# Altium PCB CarGeoLogger.PcbDoc
Units mil, origin at the board's own origin, x right, y up, seen from the top; angles counter-clockwise.
Board outline 2000 x 2000 mil, 2 copper layers (Top Layer, Bottom Layer); 46 components, 44 nets, 249 pads, 53 vias.
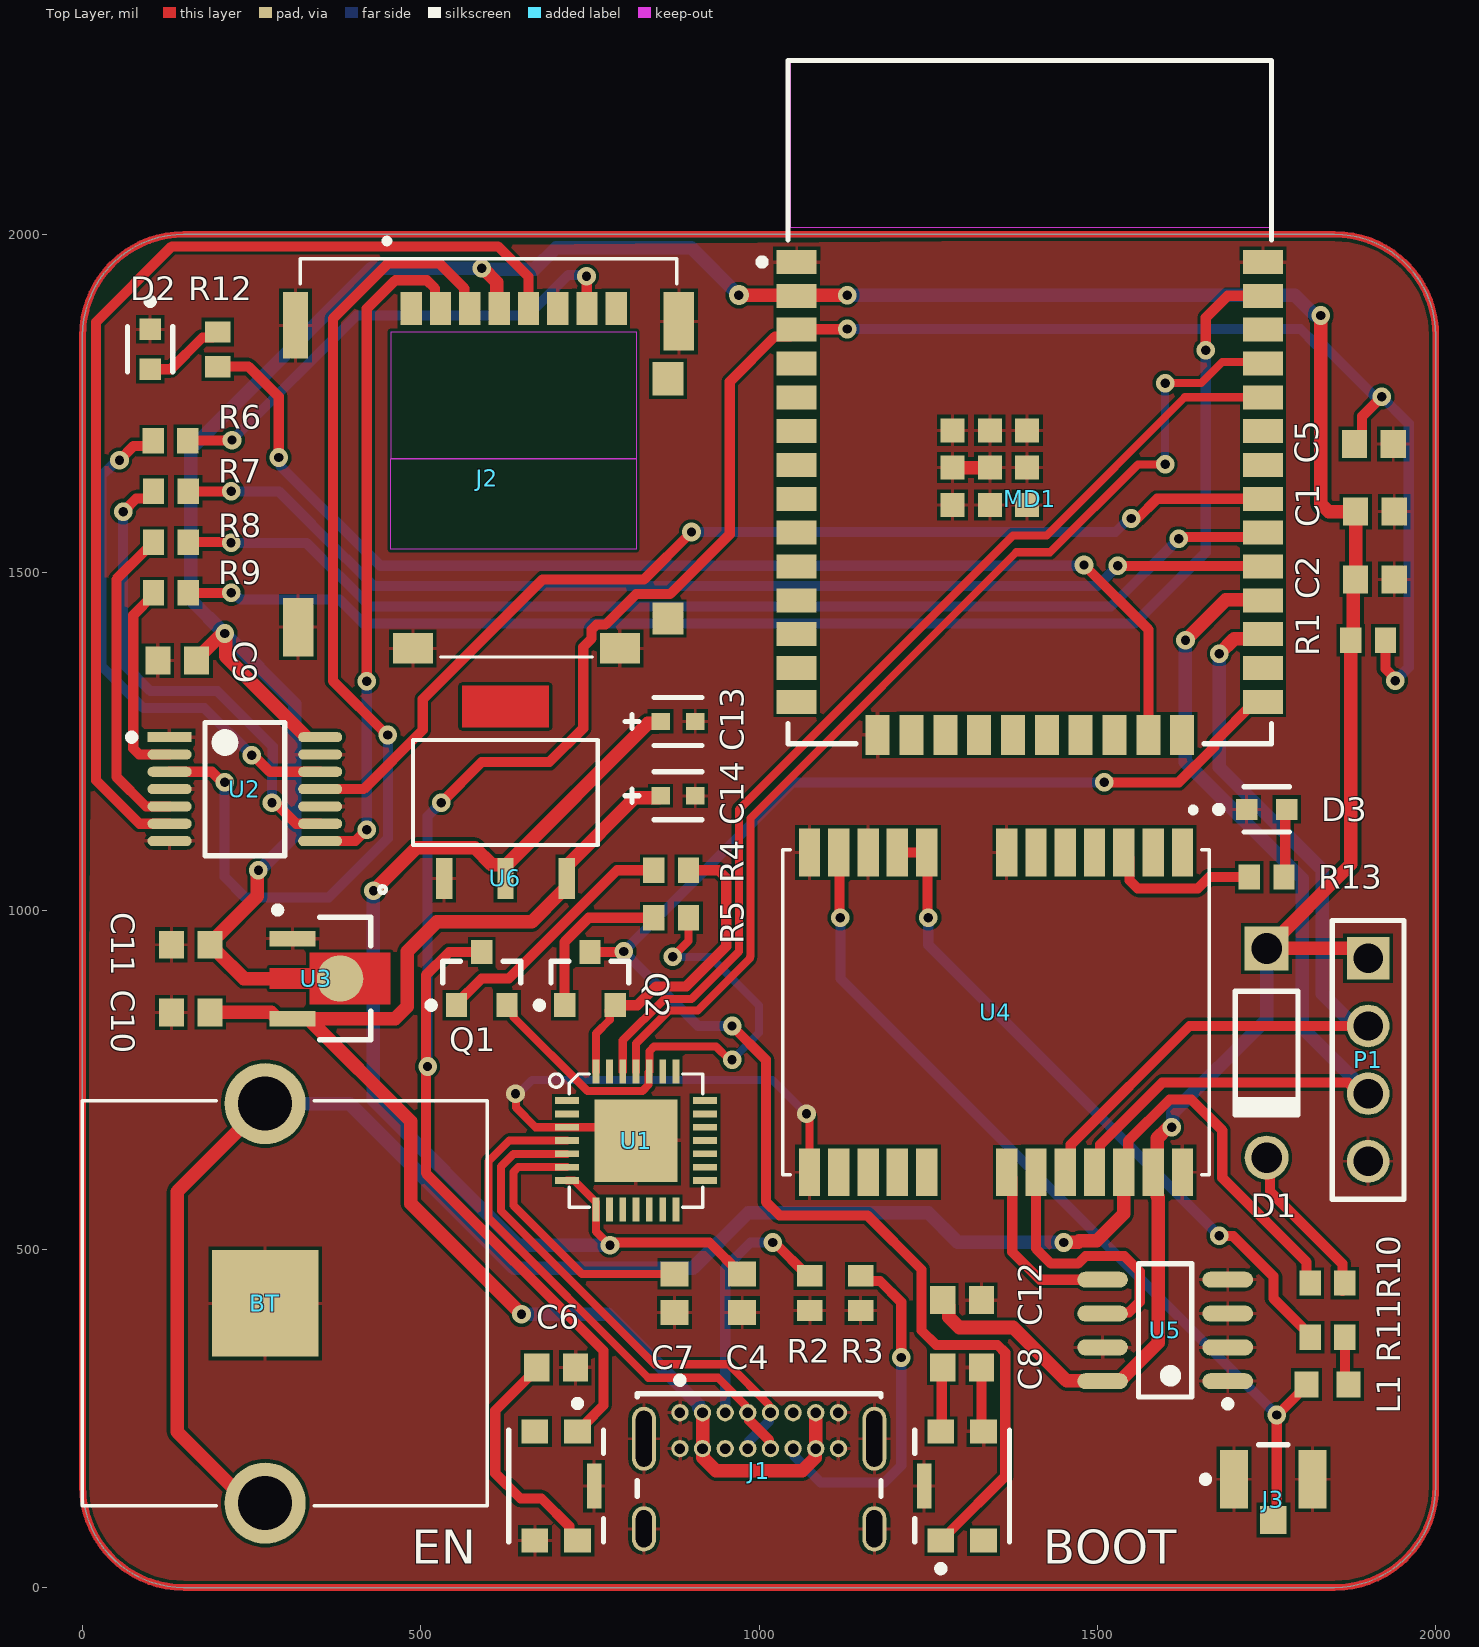
[diagram p0: Top Layer view]
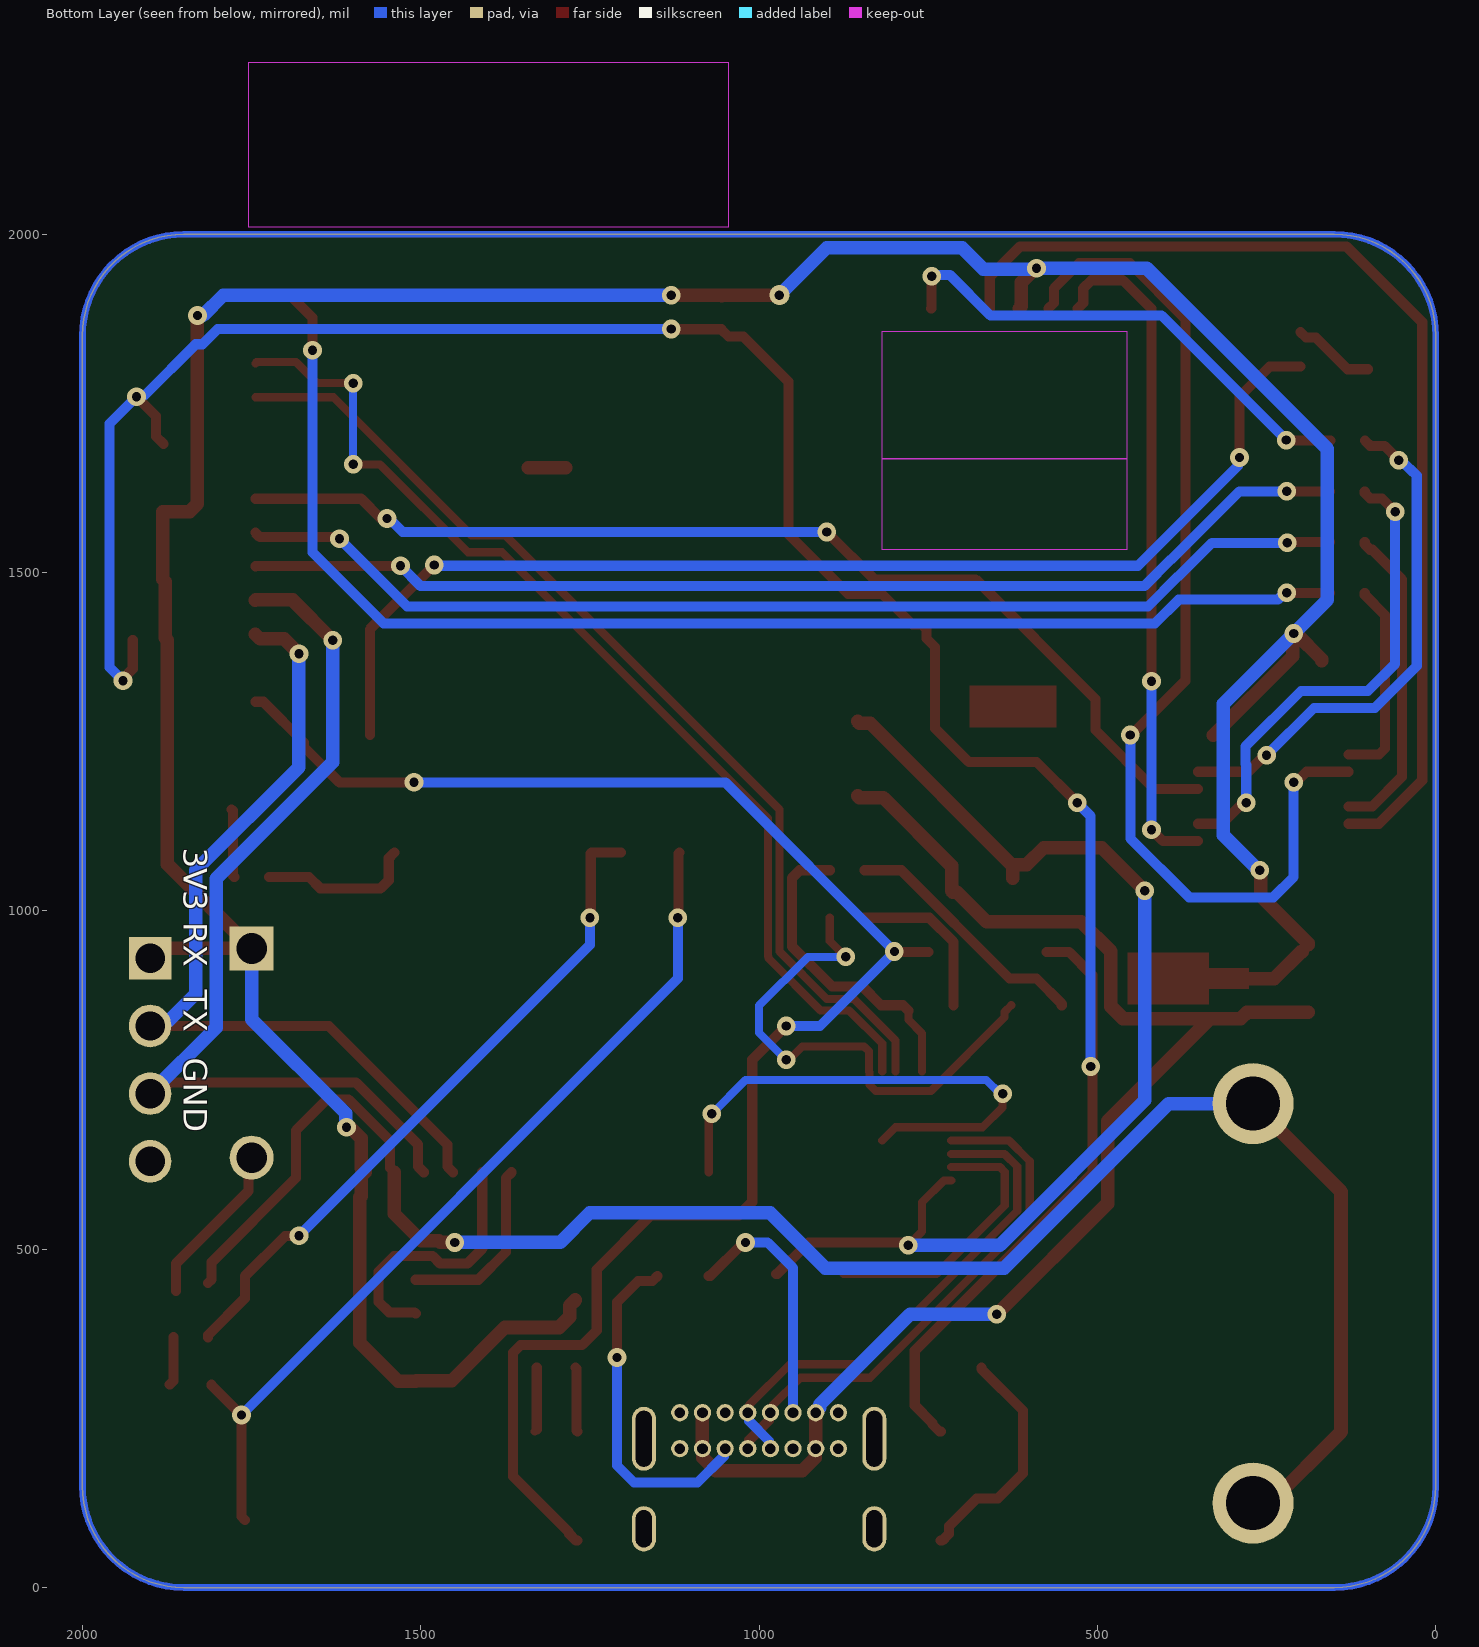
[diagram p1: Bottom Layer view, seen from below]
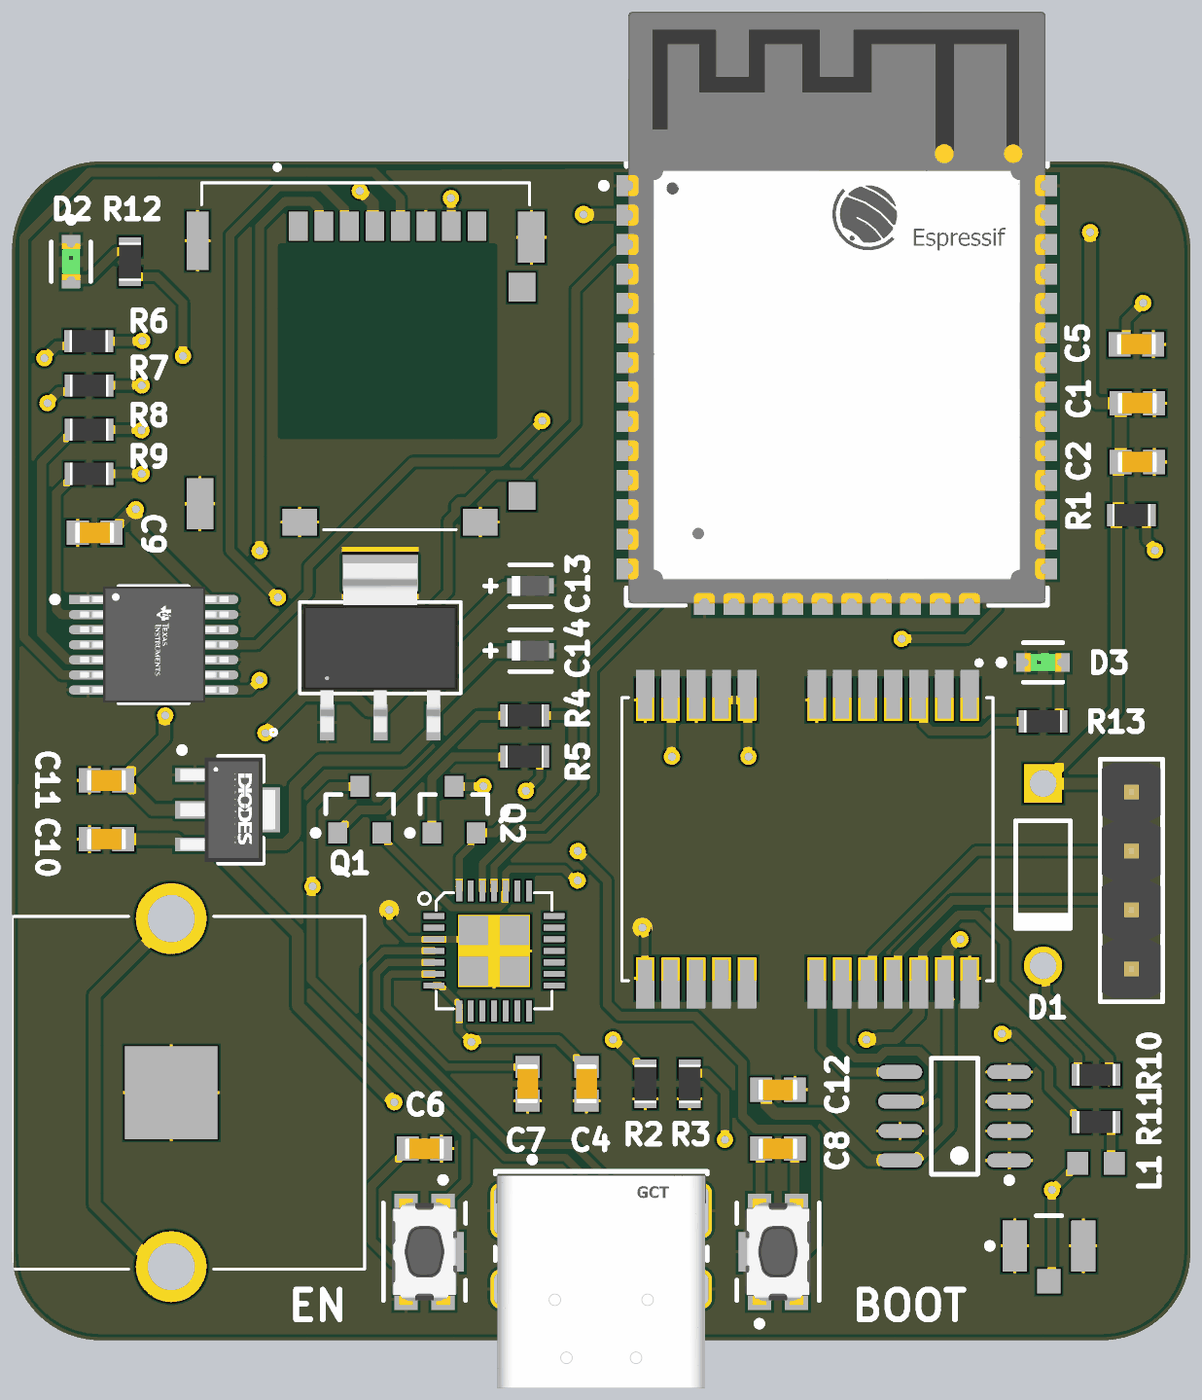
[diagram p2: 3D render of the assembled board from above, using the file's embedded part models]

## Layer stack, top to bottom
Top Solder: solder mask 0.4, Solder Resist, Dk 3.5
Top Layer: signal copper 1.4
Dielectric 1: dielectric 12.6, FR-4, Dk 4.8
Bottom Layer: signal copper 1.4
Bottom Solder: solder mask 0.4, Solder Resist, Dk 3.5

## Board outline
0,150 0,1850 cw(c150,1850) 150,2000 1850,2000 cw(c1850,1850) 2000,1850 2000,150 cw(c1850,150) 1850,0 150,0 cw(c150,150)

## Design rules (kind name [scope] priority, off if disabled: settings)
BoardOutlineClearance [All] p1: gap=7.87 ignorepadtopadclearanceinfootprint=FALSE
Clearance [All] p1: gap=5 ignorepadtopadclearanceinfootprint=FALSE except(9.84: Arc-Hole Track-Hole SMDPad-Hole THPad-Hole Via-Hole Fill-Hole Poly-Hole Region-Hole Text-Hole)
ComponentClearance [All] p1: gap=5 collisioncheckmode=3 verticalgap=5 showdistances=TRUE
DiffPairsRouting [All] p1: maxlimit=10 minlimit=5 mostfreqgap=5 toplayer_minwidth=5 toplayer_maxwidth=1000 toplayer_prefwidth=5 bottomlayer_minwidth=5 bottomlayer_maxwidth=1000 bottomlayer_prefwidth=5 maxuncoupledlength=500
Height [All] p1: minheight=0 maxheight=71497.94 prefheight=500
HoleSize [All] p1: absolutevalues=TRUE maxlimit=248.03 minlimit=11.81 maxpercent=80.000 minpercent=20.000
HoleToHoleClearance [All] p1: gap=9.84 allowstackedmicrovias=FALSE
MinimumAnnularRing [All] p1: minimumring=3
MinimumSolderMaskSliver [All] p1: minsoldermaskwidth=0
PlaneClearance [All] p1: clearance=5
PlaneConnect PlaneConnectPowerPads [InPadClass('PowerPads')] p1: planeconnectstyle=Direct reliefexpansion=20 reliefentries=4 reliefconductorwidth=10 reliefairgap=10
PlaneConnect [All] p2: pad.planeconnectstyle=Relief pad.reliefexpansion=11.81 pad.reliefentries=4 pad.reliefconductorwidth=5 pad.reliefairgap=5 via.planeconnectstyle=Direct via.reliefexpansion=11.81 via.reliefentries=4 via.reliefconductorwidth=5 via.reliefairgap=5
PolygonConnect PolygonConnectPowerPads [All vs (InPadClass('PowerPads'))] p1: connectstyle=Direct reliefconductorwidth=10 reliefentries=4 polygonreliefangle="90 Angle" airgapwidth=10
PolygonConnect [All] p2: thpad.connectstyle=Relief thpad.reliefconductorwidth=5 thpad.reliefentries=4 thpad.polygonreliefangle="90 Angle" thpad.airgapwidth=5 smdpad.connectstyle=Relief smdpad.reliefconductorwidth=5 smdpad.reliefentries=4 smdpad.polygonreliefangle="90 Angle" smdpad.airgapwidth=5 via.connectstyle=Direct via.reliefconductorwidth=5 via.reliefentries=4 via.polygonreliefangle="90 Angle" via.airgapwidth=5
RoutingVias [All] p1: holewidth=11.81 width=23.62 viastyle="Through Hole" minholewidth=11.81 minwidth=23.62 maxholewidth=23.62 maxwidth=259.84
SilkToSilkClearance [All] p1: silktosilkclearance=0
SilkToSolderMaskClearance [IsPad] p1: minsilkscreentomaskgap=5 clearancetoexposedcopper=TRUE
SolderMaskExpansion [All] p1: expansion=2.95 istentingtop=FALSE
Width [All] p1: maxlimit=1000 minlimit=5 preferedwidth=5 minimp=50.000000 maximp=50.000000 favimp=50.000000
20 further rules are at their usual default settings.

## Components (designator, comment, footprint, x,y, rotation, side; value= is the part's Value field where it differs from the comment)
BOOT "KMR221GLFS" FP-KMR221GLFS-MFG 1300,150 r90 top (schematic designator SW2)
BT "BHX1-LR44-PC" BAT_BHX1-LR44-PC 270,420 r90 top
C1 "10u" CAPC1608X90X35ML10T15 1910,1590 r180 top
C2 "0.1u" CAPC1608X90X35ML10T15 1910,1490 r180 top
C4 "1u" CAPC1608X90X35ML10T15 975,435 r90 top
C5 "0.1u" CAPC1608X90X35ML10T15 1908.54,1690 r180 top
C6 "0.1u" CAPC1608X90X35ML10T15 700,325 r180 top
C7 "0.1u" CAPC1608X90X35ML10T15 875,435 r90 top
C8 "0.1u" CAPC1608X90X35ML10T15 1300,325 r180 top
C9 "0.1u" CAPC1608X90X35ML10T15 140,1370 r0 top
C10 "10u" CAPC1608X90X35ML10T15 160,850 r0 top
C11 "22u" CAPC1608X90X35ML10T15 160,950 r0 top
C12 "0.1u" CAPC1608X90X35ML10T15 1300,425 r180 top
C13 "10u" FP-F38M-MFG 880,1280 r180 top value=10uF
C14 "10u" FP-F38M-MFG 880,1170 r180 top value=10uF
D1 "1N5817-T" DIOD-DO-41-P-2 1750,790 r270 top
D2 "LTST-C190GKT" FP-LTST-C190GKT-MFG 100,1830 r270 top
D3 "LTST-C190GKT" FP-LTST-C190GKT-MFG 1750,1150 r0 top
EN "KMR221GLFS" FP-KMR221GLFS-MFG 700,150 r270 top (schematic designator SW1)
J1 "USB4085-GF-A" FP-USB4085-GF-A-MFG 1000,100 r0 top
J2 "503182-1852" MOLEX_503182-1852 600,1640 r0 top
J3 "U.FL-R-SMT(10)" HRS-U.FL-R-SMT_V 1760,160 r0 top
L1 "27u" INDC1608X95N 1840,300 r180 top
MD1 "ESP32-WROOM-32D(M113DH2800PH3Q0)" FP-ESP32-WROOM-32D_M113DH-MFG 1400,1751.97 r0 top
P1 "" 61300411121 1900,780 r270 top
Q1 "BC817-40LT1G" ONSC-SOT-23-3-318-08_V 590,900 r90 top
Q2 "BC817-40LT1G" ONSC-SOT-23-3-318-08_V 750,900 r90 top
R1 "10k" RESC1609X50X30NL8T20 1900,1400 r0 top
R2 "5.1k" RESC1609X50X30NL8T20 1075,435 r90 top
R3 "5.1k" RESC1609X50X30NL8T20 1150,435 r90 top
R4 "10k" RESC1609X50X30NL8T20 870,1060 r0 top
R5 "10k" RESC1609X50X30NL8T20 870,990 r0 top
R6 "3.3K" RESC1609X50X30NL8T20 130,1695 r180 top
R7 "3.3K" RESC1609X50X30NL8T20 130.59,1620 r180 top
R8 "3.3K" RESC1609X50X30NL8T20 130.59,1545 r180 top
R9 "3.3K" RESC1609X50X30NL8T20 130.59,1470 r0 top
R10 "1k" RESC1609X50X30NL8T20 1840,450 r180 top
R11 "22" RESC1609X50X30NL8T20 1840,370 r180 top
R12 "1k" RESC1609X50X30NL8T20 200,1830 r270 top
R13 "1k" RESC1609X50X30NL8T20 1750,1050 r180 top
U1 "CP2102-GMR(QFN28)" QFN28G_0.5-5X5MM 818.03,660.63 r0 top
U2 "SN74LVC125APWR" FP-PW0014A-IPC_B 240,1180 r0 top
U3 "AZ1117CR-3.3TRG1" FP-SOT89-MFG 375,900 r270 top
U4 "NEO-6M-GPS" XCVR_NEO-6M-GPS 1350,850 r270 top
U5 "24AA32AT-I/SN" SOIC-SN8_L 1600,380 r180 top
U6 "NCV1117ST50T3G" SOT223-3_ONS 625,1175 r0 top

## Footprints (in the part's own frame and the unit in brackets; to place one, negate y for a bottom-side part, rotate by r counter-clockwise, add the part's x,y. Pads: shape width x height; smd on the part's side, far side on the other; paste and mask are expansions set on the pad)
61300411121 [mm] "Pin Header, pitch 2.54 mm, THT, Vertical, single row, 4p"
  rect 1.6x1.6 hole 1.1: 1(-3.81,0)
  round 1.6 hole 1.1: 2(-1.27,0) 3(1.27,0) 4(3.81,0)
  silkscreen extent -5.23,-1.35 5.23,1.35, body extent -5.08,-1.27 5.08,1.27, height 8.57
BAT_BHX1-LR44-PC [mm]
  round 3.045 hole 2.03: 1+(-7.5,0) 2+(7.5,0)
  rect 4x4 smd: NEG(0,0)
  silkscreen extent -7.6,-8.34 7.6,6.86
CAPC1608X90X35ML10T15 [mm] "Chip Capacitor, 2-Leads, Body 1.7x0.9mm, IPC Low Density"
  rect 0.95x1.05 smd: 1(-0.725,0) 2(0.725,0)
  body extent -0.85,-0.45 0.85,0.45, height 0.9
DIOD-DO-41-P-2 [mm] "THD, 2-Leads, Body 4.635x2.36mm, Pin Spacing 7.85mm"
  rect 1.65x1.65 hole 1.15: 1(-3.925,0)
  round 1.65 hole 1.15: 2(3.925,0)
  silkscreen extent -2.32,-1.18 2.32,1.18, body extent -4.36,-1.18 4.36,1.18, height 2.35
FP-ESP32-WROOM-32D_M113DH-MFG [mm]
  rect 1.5x0.9 smd paste+0 mask+0: 1(-8.75,5.26) 2(-8.75,3.99) 3(-8.75,2.72) 4(-8.75,1.45) 5(-8.75,0.18) 6(-8.75,-1.09) 7(-8.75,-2.36) 8(-8.75,-3.63) 9(-8.75,-4.9) 10(-8.75,-6.17) 11(-8.75,-7.44) 12(-8.75,-8.71) 13(-8.75,-9.98) 14(-8.75,-11.25) 25(8.75,-11.25) 26(8.75,-9.98) 27(8.75,-8.71) 28(8.75,-7.44) 29(8.75,-6.17) 30(8.75,-4.9) 31(8.75,-3.63) 32(8.75,-2.36) 33(8.75,-1.09) 34(8.75,0.18) 35(8.75,1.45) 36(8.75,2.72) 37(8.75,3.99) 38(8.75,5.26)
  rect 0.9x1.5 smd paste+0 mask+0: 15(-5.71,-12.5) 16(-4.44,-12.5) 17(-3.17,-12.5) 18(-1.9,-12.5) 19(-0.63,-12.5) 20(0.64,-12.5) 21(1.91,-12.5) 22(3.18,-12.5) 23(4.45,-12.5) 24(5.72,-12.5)
  rect 0.9x0.9 smd paste+0 mask+0: 39(-2.9,-3.86) 39(-2.9,-2.46) 39(-2.9,-1.06) 39(-1.5,-3.86) 39(-1.5,-2.46) 39(-1.5,-1.06) 39(-0.1,-3.86) 39(-0.1,-2.46) 39(-0.1,-1.06)
  Keep-Out Layer region: -9,6.56 9,6.56 9,12.75 -9,12.75
  Keep-Out Layer region: -9,6.56 9,6.56 9,12.75 -9,12.75
  silkscreen extent -10.17,-12.83 9.08,12.83, body extent -9.6,-13.35 9.6,12.93, height 0.25
FP-F38M-MFG [mm]
  rect 0.7x0.65 smd paste+0 mask+0: 1(-0.65,0) 2(0.65,0)
  silkscreen extent -0.9,-0.9 1.97,0.9, body extent -1.1,-0.63 1.1,0.63, height 0.25
FP-KMR221GLFS-MFG [mm]
  rect 0.9x1 smd paste+0 mask+0: 1(-2.05,0.8) 2(2.05,0.8) 3(-2.05,-0.8) 4(2.05,-0.8)
  rect 1.7x0.55 smd paste+0 mask+0: 5(0,1.425)
  silkscreen extent -3.22,-1.78 2.1,1.78, body extent -2.6,-1.5 2.6,1.8, height 0.25
FP-LTST-C190GKT-MFG [mm]
  rect 0.8x0.8 smd paste+0 mask+0: 1(-0.75,0) 2(0.75,0)
  silkscreen extent -1.92,-0.85 0.85,0.85, body extent -1.25,-0.55 1.25,0.55, height 0.25
FP-PW0014A-IPC_B [mm]
  rect 1.655x0.381 smd paste+0 mask+0: 1(-2.825,1.95)
  rrect100% 1.655x0.381 smd paste+0 mask+0: 2(-2.825,1.3) 3(-2.825,0.65) 4(-2.825,0) 5(-2.825,-0.65) 6(-2.825,-1.3) 7(-2.825,-1.95) 8(2.825,-1.95) 9(2.825,-1.3) 10(2.825,-0.65) 11(2.825,0) 12(2.825,0.65) 13(2.825,1.3) 14(2.825,1.95)
  silkscreen extent -4.37,-2.5 1.5,2.5, body extent -3.9,-2.75 3.9,2.75, height 0.25
FP-SOT89-MFG [mm]
  rect 0.58x1.73 smd paste+0 mask+0: 1(-1.5,-1.635) 3(1.5,-1.635)
  round 1.74 smd paste+0 mask+0: 2(0,0.146)
  Top Layer region: -0.38,-2.5 -0.38,-1 -0.967,-1 -0.967,2.03 0.967,2.03 0.967,-1 0.38,-1 0.38,-2.5
  silkscreen extent -2.7,-2.32 2.3,1.3, body extent -2.4,-2.6 2.4,2.13, height 0.25
FP-USB4085-GF-A-MFG [mm]
  rrect100% 0.9x2.4 hole 2.1 slot 0.6 at 0 deg paste-1000 mask+0: 1(-4.325,3.045) 2(4.325,3.045)
  rrect100% 0.9x1.7 hole 1.4 slot 0.6 at 0 deg paste-1000 mask+0: 3(-4.325,-0.335) 4(4.325,-0.335)
  round 0.65 hole 0.4 paste-1000 mask+0: A1(-2.975,4.025) A4(-2.125,4.025) A5(-1.275,4.025) A6(-0.425,4.025) A7(0.425,4.025) A8(1.275,4.025) A9(2.125,4.025) A12(2.975,4.025) B1(2.975,2.675) B4(2.125,2.675) B5(1.275,2.675) B6(0.425,2.675) B7(-0.425,2.675) B8(-1.275,2.675) B9(-2.125,2.675) B12(-2.975,2.675)
  silkscreen extent -4.57,0.89 4.57,5.37, body extent -4.87,-4.83 4.87,4.83, height 0.25
HRS-U.FL-R-SMT_V [mm] "SMD, 3-Leads, Body 2.6x2.6mm"
  rect 1.05x2.2 smd: 1(-1.475,0) 2(1.475,0)
  rect 1x1.05 smd: 3(0,-1.525)
  silkscreen extent -2.67,-0.12 0.55,1.3, body extent -1.3,-1.3 1.3,1.3, height 1.25
INDC1608X95N [mm]
  rect 0.9x0.97 smd: 1(-0.785,0) 2(0.785,0)
MOLEX_503182-1852 [mm]
  rect 0.8x1.24 smd: 1(-2.9,6.355) 2(-1.8,6.355) 3(-0.7,6.355) 4(0.4,6.355) 5(1.5,6.355) 6(2.6,6.355) 7(3.7,6.355) 8(4.8,6.355)
  rect 1.16x1.2 smd: DT(6.74,-5.275)
  rect 0.95x2.5 smd: P1(-7.245,5.725)
  rect 1.15x2.2 smd: P2(7.145,5.875) P3(-7.145,-5.605)
  rect 1.5x1.15 smd: P4(-2.84,-6.4) P5(4.94,-6.4)
  rect 1.16x1.25 smd: SW(6.74,3.725)
  Keep-Out Layer region: 5.55,-2.682 -3.659,-2.682 -3.659,0.725 5.55,0.725
  Keep-Out Layer region: 5.55,0.726 -3.655,0.726 -3.655,5.485 5.55,5.485
  Keep-Out Layer region: 5.55,0.727 -3.658,0.727 -3.658,5.485 5.55,5.485
  silkscreen extent -7.07,-6.73 7.07,8.99
ONSC-SOT-23-3-318-08_V [mm] "SOT23, 3-Leads, Body 2.92x1.3mm, Pitch 0.95mm"
  rect 0.9x0.8 smd: 1(-1,0.95) 2(-1,-0.95) 3(1,0)
  silkscreen extent -1.12,-1.46 0.65,2.02, body extent -0.65,-1.46 0.65,1.46, height 1.11
QFN28G_0.5-5X5MM [mm]
  rect 0.9x0.254 smd: 1(-2.59,1.5) 2(-2.59,1) 3(-2.59,0.5) 4(-2.59,0) 5(-2.59,-0.5) 6(-2.59,-1) 7(-2.59,-1.5) 15(2.59,-1.5) 16(2.59,-1) 17(2.59,-0.5) 18(2.59,0) 19(2.59,0.5) 20(2.59,1) 21(2.59,1.5)
  rect 0.254x0.9 smd: 8(-1.5,-2.59) 9(-1,-2.59) 10(-0.5,-2.59) 11(0,-2.59) 12(0.5,-2.59) 13(1,-2.59) 14(1.5,-2.59) 22(1.5,2.59) 23(1,2.59) 24(0.5,2.59) 25(0,2.59) 26(-0.5,2.59) 27(-1,2.59) 28(-1.5,2.59)
  rect 3.1x3.1 smd paste-3: 29(0,0)
  silkscreen extent -3.25,-2.5 2.5,2.5
RESC1609X50X30NL8T20 [mm] "Chip Resistor, 2-Leads, Body 1.65x0.95mm, IPC Medium Density"
  rect 0.8x0.95 smd: 1(-0.65,0) 2(0.65,0)
  body extent -0.82,-0.48 0.82,0.48, height 0.5
SOIC-SN8_L [mm] "SOIC, 8-Leads, Body 4.9x3.9mm, Pitch 1.27mm, IPC High Density"
  oval 1.9x0.6 smd: 1(-2.35,1.905) 2(-2.35,0.635) 3(-2.35,-0.635) 4(-2.35,-1.905) 5(2.35,-1.905) 6(2.35,-0.635) 7(2.35,0.635) 8(2.35,1.905)
  silkscreen extent -2.48,-2.5 1,2.88, body extent -2,-2.5 2,2.5, height 1.75
SOT223-3_ONS [mil]
  rect 24x61 smd paste+0 mask+0: 1(-90.5,-127) 2(0,-127) 3(90.5,-127)
  Top Layer region: 64,96.5 64,157.5 -64,157.5 -64,96.5
  silkscreen extent -186,-148 136,78, body extent -131,-144 131,144, height 68
XCVR_NEO-6M-GPS [mm]
  rect 1.8x0.8 smd paste-2: 1(-6,7) 2(-6,5.9) 3(-6,4.8) 4(-6,3.7) 5(-6,2.6) 6(-6,1.5) 7(-6,0.4) 8(-6,-2.6) 9(-6,-3.7) 10(-6,-4.8) 11(-6,-5.9) 12(-6,-7) 13(6,-7) 14(6,-5.9) 15(6,-4.8) 16(6,-3.7) 17(6,-2.6) 18(6,0.4) 19(6,1.5) 20(6,2.6) 21(6,3.7) 22(6,4.8) 23(6,5.9) 24(6,7)
  silkscreen extent -7.7,-8 6.1,8

## Part data
BOOT EN: library part CMP-10040-000018-1, "SWITCH TACTILE SPST-NO 0.05A 32V", Case/Package=SMD/SMT, Contact Current Rating=50mA, Contact Resistance=100mR, Max Operating Temperature=85°C, Max Voltage Rating (DC)=32V, Min Operating Temperature=-40°C, Operating Force=2N, Package Quantity=1, Power Rating=1W, Actuator Length=0.5mm, Actuator Type=Standard, Contact Material=Silver, Contact Plating=Silver, Current Rating=50mA, Depth=4.6mm, Illumination Type=Non-Illuminated, Lead Free="Lead Free", Length=2.8mm, Max Current Rating=50mA, Mechanical Life=200000Cycles, Mount="Surface Mount", Orientation=Straight, Packaging="Tape and Reel", Radiation Hardening=No, REACH SVHC="No SVHC", Switch Function=Off-Mom, Switch Travel=0.25mm, Termination="Gull Wing", Throw Configuration=SPST, Voltage Rating (DC)=32V, Width=2.8mm
BT: library part CMP-047-000000-1, "Battery Retainer Coin, 12.0mm 1 Cell PC Pin", Package=None, Availability=Unavailable, Component Type=Standard, ComponentLink1Description=https://www.digikey.com/en/products/detail/mpd-memory-protection-devices/BHX1-LR44-PC/2194773, Design Item ID=BHX1-LR44-PC, MF=MPD, MP=BHX1-LR44-PC, Pin Count=3, Price=None, SnapEDA_Link=https://www.snapeda.com/parts/BHX1-LR44-PC/MPD/view-part/4480525/?ref=snap, Source=SnapEDAsch.SchLib
C1 C2 C4 C5 C6 C7 C8 C9 C10 C12: library part CMP-2000-04945-1, "Chip Capacitor, 0603 (1608 Metric)", Capacitance=22pF, Case Size/Dimension=0603, Dielectric=C0G, Manufacturer=Murata, Package Description="2-Pin Surface Mount Device, Body 1.6 x 0.8 mm", Package Reference=603, Rated Voltage=50V, Tolerance (%)=±5%, Datasheet URL=https://datasheet.ciiva.com/11786/0900766b807a1cab-11786398.pdf, Datasheet Version=Jul-06, Manufacturer URL=http://www.murata.com/
C11: library part CMP-2000-04945-1, "Chip Capacitor, 0603 (1608 Metric), F381A106MMAAH1", Capacitance=22pF, Case Size/Dimension=0603, Dielectric=C0G, Manufacturer=Murata, Package Description="2-Pin Surface Mount Device, Body 1.6 x 0.8 mm", Package Reference=603, Rated Voltage=50V, Tolerance (%)=±5%, ComponentLink1Description=https://www.digikey.com/en/products/detail/kyocera-avx/F381A106MMAAH1/5730801, Datasheet URL=https://datasheet.ciiva.com/11786/0900766b807a1cab-11786398.pdf, Datasheet Version=Jul-06, Manufacturer URL=http://www.murata.com/
C13 C14: library part CMP-04423-000015-1, "CAP TANT POLY 10UF 10V SMD", Capacitance=10uF, Leakage Current=10uA, Manufacturer=AVX, Manufacturer Part Number=F381A106MMAAH1, Package=F38M, Ripple Current=289mA, Temperature="-55°C to +105°C", Temperature Range High=+105°C, Temperature Range Low=-55°C, Tolerance=20%, Voltage Rating=10V, Automotive=No, Category=Cap, ComponentLink2Description=Datasheet, ComponentLink2URL=http://datasheets.avx.com/F38.pdf, Device Class L1="Passive Components", Device Class L2=Capacitors, Device Class L3="Polymer Capacitors", Digikey Description="CAP TANT POLY 10UF 10V SMD", Dissipation Factor=15%, Esr=300mΩ, Footprint Url=http://www.avx.com/download/software/literature/AVX-Footprint-Library.pdf, Height=0.9mm, Lead Free=Yes, Life=1000Hours, Material=Tantalum-Polymer, Mouser Description="Cap Tant Polymer 10uF 10VDC M CASE 20% (1.6 X 0.85 X 0.8mm) Undertab SMD 1608-09 0.3 Ohm 105C T/R", Octopart=https://octopart.com/f381a106mmaah1-avx-67040376, RoHS=TRUE
D1: library part CMP-2000-05521-1, "Schottky Barrier Rectifier, 1 A, 20 V, -65 to 125 degC, 2-Pin DO-41, RoHS, Tape and Reel", If - Forward Current=1A, Ifsm - Forward Surge Current=25A, Ir - Reverse Current=1000uA, Manufacturer=DiodesIncorporated, Maximum Operating Temperature=+125C, Minimum Operating Temperature=-65C, Operating Temperature Range=-65Cto+125C, Package / Case=DO-41, Package Description="2-Pin Through Hole Device, Body 4.635 x 2.36 mm, Pin Spacing 7.85 mm", Package Reference=DO-41-P-2, Vf - Forward Voltage=0.75Vat3A, Vrrm - Repetitive Reverse Voltage=20V, Brand=DiodesIncorporated, Configuration=Single, Datasheet URL=http://www.diodes.com/_files/datasheets/ds23001.pdf, Datasheet Version="Rev. 8-2, 05/2009", Factory Pack Quantity=5000, Height=2.72mm, Length=5.21mm, Manufacturer URL=http://www.diodes.com/, Mounting Style=ThroughHole, Mounting Technology=ThroughHole, Packaging=Reel, Product=SchottkyRectifiers, Product Category=SchottkyDiodes&Rectifiers, RoHS=True, Series=1N58, Technology=Si, Termination Style=ThroughHole, Type=SchottkyDiode, Unit Weight=0.010582oz, Width=2.72mm
D2 D3: library part CMP-22017-000005-2, "LED GREEN CLEAR CHIP SMD", Case Code (Imperial)=0603, Case Code (Metric)=1608, Color=Green, Forward Current=30mA, Forward Voltage=2.1V, Lens Color=Colorless, Max Operating Temperature=85°C, Min Operating Temperature=-55°C, Package Quantity=1, Power Dissipation=100mW, Reverse Voltage=5V, Test Current=10mA, Voltage=2V, Case/Package=0603, Depth=0.8mm, Dominant Wavelength=569nm, Height=0.8mm, Illumination Color=Green, Lead Free="Lead Free", Length=1.6mm, Lens Style=Clear, Lens Transparency=Clear, Luminous Intensity=6mcd, Mount="Surface Mount", Number of Elements=1, Number of LEDs=1, Number of Pins=2, Packaging="Tape and Reel", Power Rating=100mW, Radiation Hardening=No, Viewing Angle=130°, Wavelength=565nm, Width=0.8mm
J1: library part CMP-196119-000001-2, "CONN RCPT USB2.0 TYPE C 24POS RA", ComponentLink1Description=https://www.digikey.com/en/products/detail/gct/USB4085-GF-A/9859662, Contact Material="Copper Alloy", Contact Plating=Gold, Gender=Receptacle, Number of Positions=16, Orientation="Right Angle", USB Standard="USB 2.0"
J2: library part CMP-041-000000-1, "Conn Micro SD Card M 8 POS 1.09mm Solder RA SMD Embossed T/R 0.5A/Contact", Package=None, Availability=Unavailable, Component Type=Standard, ComponentLink1Description=https://www.digikey.com/en/products/detail/molex/5031821852/4693482?utm_source=snapeda&utm_medium=aggregator&utm_campaign=buynow, Design Item ID=503182-1852, MP=503182-1852, Pin Count=15, Price=None, Source=503182-1852.SchLib
J3: library part CMP-002-00035-2, "Ultra Small Surface Mount Coaxial Connector, 50 Ohm, -40 to 90 degC, 3-Pin SMD, RoHS, Tape and Reel", Case/Package=U.FL-R-SMT, Manufacturer="Hirose Electric", Max Operating Temperature=90°C, Min Operating Temperature=-40°C, Package Description="3-Pin Surface Mount Device, Body 2.6 x 2.6 mm", Package Quantity=2500, Resistance=50Ohm, ComponentLink1Description=https://www.digikey.com/en/products/detail/hirose-electric-co-ltd/U-FL-R-SMT-1-10/2391570, Connector Type=RF&Coax, Contact Material=Brass, Contact Plating=Gold, Datasheet URL=https://www.hirose.com/product/en/download_file/key_name/U.FL/category/Catalog/doc_file_id/31697/?file_category_id=4&item_id=15&is_series=1, Datasheet Version=Aug-16, Fastening Type=Snap, Impedance=50Ohm, Manufacturer URL=https://www.hirose.com, Mounting Technology=SM, Package Reference=U.FL-R-SMT, Packaging=TapeandReel, RoHS Compliant=True
L1: library part CMP-049-000000-1, "Ind RF Chip Shielded Multi-Layer 27uH 10% 1MHz 20Q-Factor Ferrite 2mA 0603 Punched Paper T/R", Package="1608 Taiyo Yuden", Check_prices=https://www.snapeda.com/parts/MLF1608C270KTD00/TDK-Lambda+Americas+Inc/view-part/?ref=eda, Component Type=Standard, Design Item ID=MLF1608C270KTD00, MF=TDK, MP=MLF1608C270KTD00, Pin Count=2, Purchase-URL=https://pricing.snapeda.com/search/part/MLF1608C270KTD00/?ref=eda, SnapEDA_Link=https://www.snapeda.com/parts/MLF1608C270KTD00/TDK-Lambda+Americas+Inc/view-part/?ref=snap, Source=MLF1608C270KTD00.SchLib
MD1: library part CMP-194065-000024-1, "RX TXRX MOD WIFI TRACE ANT SMD"
P1: library part CMP-1502-01064-1, "THT Vertical Pin Header WR-PHD, Pitch 2.54 mm, Single Row, 4 pins", Contact Resistance=20mOhm, Manufacturer="Wurth Elektronik", Operating Temperature=-40to105degC, Package Reference=61300411121, Rated Current=3A, Withstanding Voltage=500VAC, Working Voltage=250VAC, Datasheet URL=https://katalog.we-online.de/em/datasheet/6130xx11121.pdf, Gender=Male, Manufacturer URL=http://www.we-online.de, Mounting Technology=THT, Orientation=Vertical, Packaging=Bag, Part Number=61300411121, Pin Number=4, Pitch=2.54mm, Publisher=WurthElektronik, Row Number=Single
Q1 Q2: library part CMP-1048-00019-1, "General Purpose Transistor, NPN Silicon, 3-Pin SOT-23, Pb-Free, Tape and Reel", Manufacturer="On Semiconductor", ComponentLink1Description="Manufacturer URL", ComponentLink1URL=http://www.onsemi.com/, ComponentLink2Description=Datasheet, ComponentLink2URL=http://www.onsemi.com/pub_link/Collateral/BC817-16LT1-D.PDF, ComponentLink3Description="Package Specification", ComponentLink3URL=http://www.onsemi.cn/pub_link/Collateral/318-08.PDF, DatasheetVersion="Rev. 12", fT Min (MHz)=100, IC Continuous (A)=0.5, Mounting Technology="Surface Mount", PackageDescription="3-Pin Small Outline Transistor, Body 2.92 x 1.3 mm, Pitch 0.95 mm", PackageReference=SOT-23-3-318-08, PackageVersion="Rev. AP, 11/2009", Packing="Tape and Reel", PartNumber=BC817-40LT1G, Polarity=NPN, RoHS=TRUE
R1 R2 R3 R4 R5 R6 R7 R8 R9 R10 R11 R12 R13: library part CMP-2000-03816-5, "Chip Resistor, 0603 (1608 Metric)", Manufacturer="Vishay Semiconductor", Max Operating Temperature="155 degC", Min Operating Temperature="-55 degC", Package Quantity=5000, Voltage Rating="75 V", ComponentLink1Description="Manufacturer URL", ComponentLink1URL=http://www.vishay.com/, ComponentLink2Description=Datasheet, ComponentLink2URL=http://www.vishay.com/docs/20035/dcrcwe3.pdf, DatasheetVersion=06/2012, Height="0.45 mm", Length="1.55 mm", Mount="Surface Mount", Mounting Technology="Surface Mount", PackageDescription="2-Pin Surface Mount Device, Body 1.575 x 0.85 mm", PackageReference=0603, Packaging="Tape and Reel", Pins=2, REACH SVHC=Unknown, RoHSCompliant=true
U1: library part CMP-037-000000-1, "USB Bridge, USB to UART USB 2.0 UART Interface 28-QFN _5x5_", Package="VFQFN-28 Vishay Siliconix", Availability=Unavailable, Component Type=Standard, ComponentLink1Description=https://www.digikey.com/en/products/detail/silicon-labs/CP2102-GMR/2051863, Design Item ID=INTERFACE-CP2102-GMR(QFN28), MF=Silicon, MP=CP2102-GMR, Pin Count=29, Price=None, SnapEDA_Link=https://www.snapeda.com/parts/CP2102-GMR/Silicon%20Labs/view-part/570818/?ref=snap, Source=SnapEDAsch.SchLib
U2: library part CMP-0440-00179-4, "IC BUF NON-INVERT 3.6V 14TSSOP", Case/Package=TSSOP, High Level Output Current=-24mA, Low Level Output Current=24mA, Max Operating Temperature=125°C, Max Power Dissipation=500mW, Max Supply Voltage=3.6V, Min Operating Temperature=-40°C, Min Supply Voltage=1.65V, Package Quantity=1, Quiescent Current=1uA, Contact Plating=Gold, Height=1.15mm, Lead Free="Lead Free", Length=5mm, Logic Function=Buffer, Mount="Surface Mount", Number of Bits=4, Number of Bits per Element=1, Number of Channels=4, Number of Circuits=4, Number of Elements=4, Number of Gates=4, Number of Input Lines=4, Number of Inputs=4, Number of Output Lines=3, Number of Outputs=4, Number of Pins=14, Packaging="Tape and Reel", Polarity=Non-Inverting, Propagation Delay=4.6ns, Radiation Hardening=No, REACH SVHC="No SVHC", Termination=SMD/SMT, Turn-On Delay Time=5.3ns, Width=4.4mm
U3: library part CMP-12756-000007-1, "IC REG LINEAR 3.3V 800MA SOT89", Dropout Voltage=1.2V, Manufacturer="Diodes Inc.", Max Junction Temp=+125°C, Max Supply Voltage=15V, Nominal Supply Current=4mA, Output Current=1.35A, Output Voltage=3.3V, Package=SOT89, Temperature="-20°C to +125°C", Temperature Range Low=-20°C, Accuracy Percentage=1%, Automotive=No, Category=IC, ComponentLink2Description=Datasheet, ComponentLink2URL=https://www.diodes.com/assets/Datasheets/AZ1117C.pdf, Device Class L1="Integrated Circuits (ICs)", Device Class L2="Power Management ICs", Device Class L3="Voltage Regulators - Linear", Digikey Description="IC REG LINEAR 3.3V 800MA SOT89", Footprint Url=https://www.diodes.com/assets/Package-Files/SOT89.pdf, Height=1.6mm, Lead Free=Yes, Manufacturer Part Number=AZ1117CR-3.3TRG1, Mouser Description="DiodesZetex AZ1117CR-3.3TRG1, LDO Regulator, 800mA, 3.3 V, ±1% 3-Pin, SOT-89", Number of Outputs=1, Octopart=https://octopart.com/az1117cr-3.3trg1-diodes+inc.-30954805, Output Type=Fixed, RoHS=TRUE, Temperature Range High=+125°C
U4: library part CMP-045-000000-1, "SMD GPS Module", Package=None, Availability=Unavailable, Component Type=Standard, Design Item ID=NEO-6M-GPS, MP=NEO-6M-GPS, Pin Count=23, Price=None, Source=NEO-6M-GPS.SchLib
U5: library part CMP-0159-00211-1, "32Kbit, 400kHz, 1.7V, I2C Serial EEPROM, 8-Pin SOIC 150mil, Industrial Temperature, Tape and Reel", Code_IPC=SOIC127P600-8, Code_JEDEC=MS-012, DatasheetVersion="revJ, Feb-2009", PackageDescription="8-Lead Plastic Small Outline (SN) - Narrow, 3.90mm Body [SOIC]", PackageReference=SOIC-SN8, PackageVersion="revBB, Aug-2009"
U6: library part CMP-053-000001-1, "No Description Available", Mfr_Name=onsemi, ComponentLink1Description=https://www.digikey.com/en/products/detail/onsemi/NCV1117ST50T3G/1792666, Copyright="Copyright (C) 2022 Ultra Librarian. All rights reserved.", Design Item ID=NCV1117ST50T3G, Digi-Key_Part_Number_1=NCV1117ST50T3GOSCT-ND, Digi-Key_Part_Number_2=NCV1117ST50T3GOSDKR-ND, Digi-Key_Part_Number_3=NCV1117ST50T3GOSTR-ND, Digi-Key_Part_Number_4=2156-NCV1117ST50T3G-OS-ND, Manufacturer_Part_Number=NCV1117ST50T3G, RefDes=RefDes, Source=NCV1117ST50T3G.SchLib, Type=DEV

## Via types
v1: diameter 27.56, hole 13.78, Top Layer to Bottom Layer, 52 vias
v2: diameter 29.53, hole 13.78, Top Layer to Bottom Layer, 1 vias

## Nets (pads, with @x,y where several pads share a name; then routed paths per layer and width w, separated by ;. In a path a pad name is that pad's centre, name@x,y a point inside that pad or via, vN(x,y) a via of type N, cw(c..) or ccw(c..) an arc to the next point about the centre after c; other vN are vias at no path point)
+3V3: C1.2 C2.2 C9.2 C11.2 C12.2 D1.1 J2.4 MD1.2 P1.1 R1.1 U2.14 U3.2 U4.23 U5.8 | length 5464.9
  Top Layer w15: v2(970,1910) v2@970.47,1909.53
  Top Layer w20: C9.2 168.54,1371.97 206.57,1410 v1(210,1410) 211.45,1408.55 211.45,1376.48 U2.14@328.65,1259.28 ; C11.2 188.54,951.97 258.55,1021.98 258.55,1058.55 v1(260,1060) ; C11.2@197.24,939.33 199.21,939.33 238.54,900 U3.2 ; v1@591.5,1950 612.23,1929.26 612.23,1893.71 J2.4 ; v2@970.47,1909.53 MD1.2@1055.51,1909.53 ; MD1.2 1055.98,1909.53 1129.53,1909.53 v1(1130,1910) ; C12.2 1280.16,416.3 1280.16,399.84 1295.67,384.33 1375.67,384.33 1454.31,305.69 1506.79,305.69 U5.8 1533.07,305 1590,361.93 1590,569.9 1589.84,570.06 1589.84,576.63 1588.03,578.44 1588.03,608.03 U4.23 1588.03,619.53 1588.03,663.79 1603,678.76 1608.35,678.76 v1(1609.8,680.2) ; v1(1830,1880) 1830,1601.72 1841.72,1590 C1.2 C2.2 1877.93,1486.48 1877.93,1403.52 R1.1 1874.41,1068.94 D1.1 1885.47,944.53 P1.1
  Bottom Layer w20: v1(260,1060) 262.05,1060 313.78,1111.73 313.78,1306.22 v1(210,1410) 160,1460 160,1682.63 427.37,1950 v1(590,1950) 591.45,1948.55 668.55,1948.55 700,1980 900,1980 v2(970,1910) ; v1(1130,1910) 1791.88,1910 1821.88,1880 v1(1830,1880) ; v1(1609.8,680.2) 1610.96,681.37 1610.96,700.96 1750,840 D1.1
+5V: C4.2 C13.2 U1.7 U1.8 U6.2 | length 1661.6
  Top Layer w12: U1.7 726.78,601.57 758.98,569.38 U1.8 758.98,526.45 v1(779.49,505.94)
  Top Layer w15: v1(779.49,505.94) 783.54,510 926.57,510 973.03,463.54 C4.2
  Top Layer w20: v1(430,1030) 493.5,1093.5 579.5,1093.5 604.5,1068.5 623,1068.5 U6.2@625,1066.5 ; U6.2 U6.2@625,1066.5 ; C13.2 851.61,1277.2 835.7,1277.2 U6.2@625,1066.5
  Bottom Layer w20: v1(430,1030) 430,720 644.06,505.94 v1(779.49,505.94)
CS: MD1.29 R7.1 | length 1659.1
  Top Layer w15: R7.1 v1(220,1620) ; v1(1530,1510) 1530.47,1509.53 1744.02,1509.53 MD1.29
  Bottom Layer w15: v1(220,1620) 290,1620 390,1520 390.71,1520 430.71,1480 1500,1480 v1(1530,1510)
CS_LLS: J2.2 U2.8 | length 1002.4
  Top Layer w15: U2.8 403.23,1103.23 v1(420,1120) ; v1(420.17,1339.26) 420,1339.43 420,1890 460,1930 460.72,1930 462.83,1932.11 508.82,1932.11 520.89,1920.04 520.89,1898.45 J2.2
  Bottom Layer w15: v1(420,1120) 420,1330.21 420.17,1330.38 v1(420.17,1339.26)
D0_LLC: J2.7 R6.1 | length 739.6
  Top Layer w15: R6.1 220.15,1695 v1(220.97,1695.82) ; v1(744.79,1937.91) 745.23,1937.47 745.23,1890.64 J2.7
  Bottom Layer w15: v1(220.97,1695.82) 405.15,1880 658.21,1880 718.21,1940 742.7,1940 v1(744.79,1937.91)
D+: J1.A6 J1.B6 U1.4 | length 786.3
  Top Layer w12: U1.4 630.63,660.63 600,630 600,546.16 836.16,310 938.99,310 980.67,268.32 980.67,261.07 J1.A6
  Top Layer w15: J1.A6 985.29,256.44 985.29,247.06 1014.71,217.65 1014.71,207.34 J1.B6
D-: J1.A7 J1.B7 U1.5 | length 765.1
  Top Layer w12: U1.5 637.11,640.94 618.5,622.34 618.5,556.83 845.33,330 954.58,330 1014.71,269.87 J1.A7@1014.71,260.49
  Top Layer w15: J1.A7@1014.71,260.49 J1.A7
  Bottom Layer w15: J1.B7 985.29,207.34 985.29,216.72 1014.71,246.13 1014.71,256.44 J1.A7
DI_LLS: J2.3 U2.3 | length 1596.9
  Top Layer w15: U2.3 191.01,1205.59 206.6,1190 v1(210,1190) ; v1(451.28,1260) 450,1260 370,1340 370,1875.36 451.75,1957.11 527.13,1957.11 564.19,1920.04 564.19,1898.45 J2.3
  Bottom Layer w15: v1(210,1190) 210,1050 240,1020 364.24,1020 451.28,1107.04 v1(451.28,1260)
DTR: Q2.2 R4.2 U1.28 | length 471.5
  Top Layer w12: U1.28 758.98,818.98 779.15,839.15 Q2.2@779.15,852.38
  Top Layer w15: Q2.2@779.15,852.38 Q2.2 819.9,860.63 847.77,888.5 892.34,888.5 951.5,947.66 951.5,1048.5 940,1060 R4.2
EN: C5.2 EN.1 MD1.3 Q1.3 R1.2 | length 3811.3
  Top Layer w15: v1(530,1160) 590,1220 690,1220 740,1270 740,1390 752.46,1402.46 752.46,1415.85 759.78,1423.17 773.17,1423.17 818.44,1468.44 868.44,1468.44 956.65,1556.65 956.65,1782.19 1023.3,1848.84 1045.3,1848.84 MD1.3 1055.98,1859.53 1129.53,1859.53 v1(1130,1860) ; Q1.3@575,939.37 541.79,939.37 507.5,905.08 507.5,772.5 v1(510,770) 507.5,767.5 507.5,612.5 770,350 770,269.21 743.68,242.89 743.68,240.93 733.46,230.71 EN.1 ; C5.2 1891.2,1701.2 1891.2,1731.2 v1(1920,1760) ; R1.2 1925.59,1357.81 1940,1343.4 v1(1940,1340)
  Bottom Layer w15: v1(510,770) 510,1140 v1(530,1160) ; v1(1130,1860) 1800,1860 1822.5,1837.5 1832.5,1837.5 1907.6,1762.4 1917.6,1762.4 1960,1720 1960,1360 v1(1940,1340)
IO0: BOOT.1 MD1.25 Q2.3 | length 2454.8
  Top Layer w15: Q2.3 799.37,939.37 v1(800,940) ; v1(960,830) 1010,780 1010,570 1030,550 1160,550 1240,470 1240,380 1261.55,358.45 1352.14,358.45 1363.68,346.91 1363.68,164.47 1280.69,81.48 1280.69,79.51 1270.47,69.29 BOOT.1 ; v1(1510,1190) 1620.28,1190 1672.57,1242.29 1672.57,1248.95 1732.68,1309.06 MD1.25
  Bottom Layer w15: v1(960,830) 910,830 v1(800,940) 1050,1190 v1(1510,1190)
LED: MD1.23 R12.2 | length 1751.9
  Top Layer w15: R12.2 245.59,1804.41 290,1760 v1(290,1670) ; v1(1480,1511.28) 1575.2,1416.08 MD1.23
  Bottom Layer w15: v1(290,1670) 292.4,1667.6 292.4,1657.6 440,1510 1478.72,1510 v1(1480,1511.28)
MISO: MD1.31 U2.11 | length 1597.6
  Top Layer w15: U2.11 415.52,1180 502.76,1267.24 502.76,1312.76 680,1490 830,1490 v1(900,1560) ; v1(1550,1580) 1559.06,1580 1588.12,1609.06 MD1.31
  Bottom Layer w15: v1(900,1560) 1526.6,1560 1546.6,1580 v1(1550,1580)
MOSI: MD1.37 R9.2 | length 2010.5
  Top Layer w15: R9.2 v1(220,1470) ; v1(1660,1828.72) 1660,1876.6 1692.45,1909.06 MD1.37
  Bottom Layer w15: v1(220,1470) 223.4,1470 233.4,1460 380,1460 415,1425 1555,1425 1660,1530 v1(1660,1828.72)
NetBT_1+: BT.1+ BT.2+ R10.2 U4.22 | length 2725
  Top Layer w15: U4.22 1545.56,620.36 1545.56,660.2 1606.63,721.28 1638.72,721.28 1684.36,675.64 1684.36,605.64 1809.07,480.93 1809.07,455.34 R10.2
  Top Layer w20: BT.1+ 245.28,124.72 140,230 140,585.28 BT.2+ ; v1(1450,510) 1450.61,510.61 1471.3,510.61 1473.19,512.5 1499.1,512.5 1538.98,552.37 U4.22
  Bottom Layer w20: BT.2+ 394.72,715.28 637.83,472.17 902.17,472.17 983.78,553.78 1250.09,553.78 1293.87,510 v1(1450,510)
NetBT_NEG: BOOT.4 BOOT.5 BT.NEG C1.1 C2.1 C4.1 C5.1 C6.1 C7.1 C8.1 C9.1 C10.1 C11.1 C12.1 C13.1 C14.1 D2.1 D3.1 EN.4 EN.5 J1.1 J1.2 J1.3 J1.4 J1.A1 J1.A12 J1.B1 J1.B12 J2.6 J2.P1 J2.P2 J2.P3 J2.P4 J2.P5 J3.1 J3.2 MD1.1 MD1.15 MD1.38 MD1.39 P1.4 R2.1 R3.1 U1.3 U1.29 U2.1 U2.4 U2.7 U2.10 U2.13 U3.1 U4.7 U4.10 U4.12 U4.13 U4.24 U5.1 U5.2 U5.3 U5.4 U5.7 U6.1 | length 916.2
  Top Layer w12: v1(640,730) 640.47,729.53 640.47,709.53 669.69,680.31 U1.3 798.35,680.31 U1.29 ; v1(1070,700) 1074.41,695.59 U4.13 ; BOOT.4@1328.54,233.66 BOOT.4
  Top Layer w15: BOOT.4@1328.54,233.66 C8.1
  Top Layer w20: MD1.39@1285.83,1655.12 MD1.39@1340.94,1655.12
  Bottom Layer w12: v1(640,730) 644.21,730 664.21,750 1020,750 v1(1070,700)
NetC6_2: C6.2 EN.2 | length 350.9
  Top Layer w15: C6.2 671.46,323.03 610,261.57 610,168.79 647.27,131.52 678.48,131.52 719.31,90.69 719.31,79.51 729.53,69.29 EN.2
NetC7_2: C7.2 U1.6 | length 411.5
  Top Layer w12: U1.6 644.03,621.26 637,614.23 637,564.49 737.95,463.54 C7.2
NetC8_2: BOOT.2 C8.2 | length 95.5
  Top Layer w15: BOOT.2 1269.98,232.18 1269.98,323.52 C8.2
NetD1_2: D1.2 R10.1 | length 243.2
  Top Layer w15: D1.2 1754.76,630.72 1754.76,585.83 1861.89,478.7 R10.1@1861.89,438.58
NetD2_2: D2.2 R12.1 | length 122.8
  Top Layer w15: D2.2 130.47,1800.47 177.34,1847.34 191.75,1847.34 R12.1
NetD3_2: D3.2 R13.1 | length 101.6
  Top Layer w15: R13.1 1777.56,1051.97 1777.56,1148.03 D3.2
NetJ1_A5: J1.A5 R2.2 | length 375.2
  Top Layer w15: v1(1020,510) 1022.64,510 1072.05,460.59 R2.2
  Bottom Layer w15: J1.A5 949.8,472.48 987.32,510 v1(1020,510)
NetJ1_B5: J1.B5 R3.2 | length 514
  Top Layer w15: R3.2 1157.57,453.02 1178.7,453.02 1210,421.72 v1(1210,340)
  Bottom Layer w15: J1.B5 1052.22,203.29 1052.22,193.91 1090.99,155.14 1184.86,155.14 1210,180.28 v1(1210,340)
NetL1_1: L1.1 R11.1 | length 72.2
  Top Layer w15: R11.1 1865.59,305.31 L1.1
NetQ1_1: Q1.1 R4.1 | length 375.5
  Top Layer w15: Q1.1 552.6,862.6 590,900 630,900 790,1060 R4.1
NetQ2_1: Q2.1 R5.1 | length 240.3
  Top Layer w15: Q2.1 712.6,954.31 748.28,990 R5.1
NetR6_2: R6.2 U2.12 | length 767
  Top Layer w15: v1(54.73,1666.22) 75.83,1687.32 96.73,1687.32 R6.2 ; v1(250,1230) 252.49,1230 276.9,1205.59 U2.12
  Bottom Layer w15: v1(54.73,1666.22) 51.33,1666.22 37.25,1652.14 36.89,1652.14 28.11,1643.36 28.11,1361.89 90,1300 180,1300 v1(250,1230)
NetR7_2: R7.2 U2.9 | length 723.1
  Top Layer w15: v1(60,1590) 79.37,1609.37 96.75,1609.37 105,1617.61 R7.2 ; v1(280,1160) 284.82,1160 316,1128.82 U2.9
  Bottom Layer w15: v1(60,1590) 60,1365.36 100.36,1325 199.24,1325 281.28,1242.96 281.28,1217.04 280,1215.76 v1(280,1160)
NetR8_2: R8.2 U2.5 | length 468.1
  Top Layer w15: R8.2 105,1542.05 96.75,1533.8 93.8,1533.8 50,1490 50,1198.32 93.91,1154.41 U2.5
NetR9_1: R9.1 U2.2 | length 299.9
  Top Layer w15: R9.1 105,1467.05 75,1437.05 75,1239.97 83.79,1231.19 U2.2
NetR11_2: R11.2 U4.8 U4.9 | length 1006
  Top Layer w15: U4.9 U4.8 1248.82,1085.04 1248.82,991.18 v1(1250,990) ; v1(1680,520) 1680.65,519.35 1700.65,519.35 1760,460 1760,427.36 1814.41,372.95 R11.2
  Bottom Layer w15: v1(1250,990) 1250,950 v1(1680,520)
RF_IN: J3.3 L1.2 U4.11 | length 1320
  Top Layer w15: U4.11 1118.86,1085.08 1118.86,991.14 v1(1120,990) ; J3.3 1765,104.96 v1(1765,255) 1765.47,255 1809.09,298.62 L1.2
  Bottom Layer w15: v1(1120,990) 1120,900 v1(1765,255)
RST: Q1.2 R5.2 U1.24 | length 775.6
  Top Layer w12: Q1.2 637.15,850.88 637.15,842.85 746.12,733.88 827.59,733.88 836.72,743.01 836.72,761.6 U1.24 837.72,792.6 844.75,799.63 936.16,799.63 955.79,780 v1(960,780) ; v1(872.12,932.12) 895.59,955.59 R5.2
  Bottom Layer w12: v1(872.12,932.12) 927.88,932.12 1000,860 1000,820 v1(960,780)
RX0: MD1.34 U1.26 | length 1508.7
  Top Layer w12: U1.26 798.35,808.35 860,870 900,870 970,940 970,1150 1374.97,1554.97 1424.97,1554.97 1629.06,1759.06 MD1.34
RX2: MD1.27 P1.2 U4.20 | length 1285.7
  Top Layer w15: U4.20 1460.61,622.03 1460.61,654.65 1635.96,830 P1.2
  Top Layer w20: v1(1680,1380) 1701.94,1401.94 1737.37,1401.94 MD1.27
  Bottom Layer w20: v1(1680,1380) 1680,1212.43 1832.48,1059.95 1832.48,877.52 1871.77,838.23 1891.77,838.23 P1.2
SCK: MD1.30 R8.1 | length 1672.8
  Top Layer w15: R8.1 218.5,1545 v1(219.59,1543.92) ; v1(1620,1550) 1622.4,1552.4 1737.84,1552.4 MD1.30
  Bottom Layer w15: v1(219.59,1543.92) 330.73,1543.92 379.64,1495 380.36,1495 425.36,1450 1520,1450 v1(1620,1550)
SCK_LLS: J2.5 U2.6 | length 1563.4
  Top Layer w15: U2.6 84.14,1128.82 20,1192.97 20,1870 132.11,1982.11 614.06,1982.11 659.06,1937.11 J2.5
SCL_GPS: U4.19 U5.6 | length 396.4
  Top Layer w15: U4.19 1409.06,500.94 1431.28,478.72 1471.23,478.72 1482.51,490 1539.52,490 1562.38,467.14 1562.38,422.38 1546.65,406.65 1509.13,406.65 U5.6
SDA_GPS: U4.18 U5.5 | length 271.7
  Top Layer w15: U4.18 1374,605.53 1374,496 1415,455 U5.5
TIMEPULSE: R13.2 U4.3 | length 233.4
  Top Layer w15: U4.3 1547.22,1077.97 1547.22,1045.35 1559.29,1033.29 1648.59,1033.29 1665.3,1050 R13.2
TX0: MD1.35 U1.25 | length 1576.9
  Top Layer w12: U1.25 818.03,803.99 867.04,853 909.31,853 986.31,930 986.31,932.27 987,932.96 987,1137 1380,1530 1430,1530 1560,1660 v1(1600,1660) ; v1(1600,1780) 1653.39,1780 1684.4,1811.01 1742.54,1811.01 MD1.35
  Bottom Layer w12: v1(1600,1660) v1(1600,1780)
TX2: MD1.28 P1.3 U4.21 | length 1406.2
  Top Layer w15: U4.21 1503.92,622.03 1503.92,654.65 1595.55,746.28 1870.73,746.28 1887.01,730 P1.3
  Top Layer w20: v1(1630,1400) 1689.53,1459.53 1744.02,1459.53 MD1.28
  Bottom Layer w20: v1(1630,1400) 1630,1220 1802.48,1047.52 1802.48,827.52 P1.3
VBUS: C10.2 C14.2 J1.A4 J1.A9 J1.B4 J1.B9 U3.3 U6.3 | length 2090.2
  Top Layer w20: C10.2 278.94,850 287.99,840.94 U3.3 U3.3@333.27,840.94 ; v1(648.78,403.74) 485,567.52 485,689.21 U3.3@333.27,840.94 ; C14.2 851.61,1167.2 816.2,1167.2 715.5,1066.5 715.5,1029.5 713.5,1027.5 707.5,1027.5 663.75,983.75 523.75,983.75 480,940 480,858.74 462.2,840.94 U3.3@333.27,840.94 ; J1.A4 J1.B9 917.01,204.65 917.01,191.73 936.22,172.52 1063.78,172.52 1082.99,191.73 1082.99,204.65 J1.B4 J1.A9
  Bottom Layer w20: v1(648.78,403.74) 776.91,403.74 910.67,269.98 910.67,265.65 916.34,259.98 J1.A4
pads on no net: BOOT.3 EN.3 J1.A8 J1.B8 J2.1 J2.8 J2.DT J2.SW MD1.4 MD1.5 MD1.6 MD1.7 MD1.8 MD1.9 MD1.10 MD1.11 MD1.12 MD1.13 MD1.14 MD1.16 MD1.17 MD1.18 MD1.19 MD1.20 MD1.21 MD1.22 MD1.24 MD1.26 MD1.32 MD1.33 MD1.36 U1.1 U1.2 U1.9 U1.10 U1.11 U1.12 U1.13 U1.14 U1.15 U1.16 U1.17 U1.18 U1.19 U1.20 U1.21 U1.22 U1.23 U1.27 U4.1 U4.2 U4.4 U4.5 U4.6 U4.14 U4.15 U4.16 U4.17

## Polygon pours and split planes (outlines as drawn)
NetBT_NEG on Top Layer "NONET_L-01_P-001" (solid, pour order 0): 20,1980 1991.5,1995.46 1991.5,-4.54 1.5,-4.54

## Other copper
Multi-Layer:
  the board outline again, w10

## Silkscreen, mask and mechanical layers (free items; w line width, h text height)
Bottom Overlay:
  text "3V3" at 1849.99,1093.29 h35 r90
  text "RX" at 1849.99,983.29 h35 r90
  text "TX" at 1849.99,883.29 h35 r90
  text "GND" at 1849.99,783.29 h35 r90